# EAGLE board Timer (EAGLE 9.6.2)
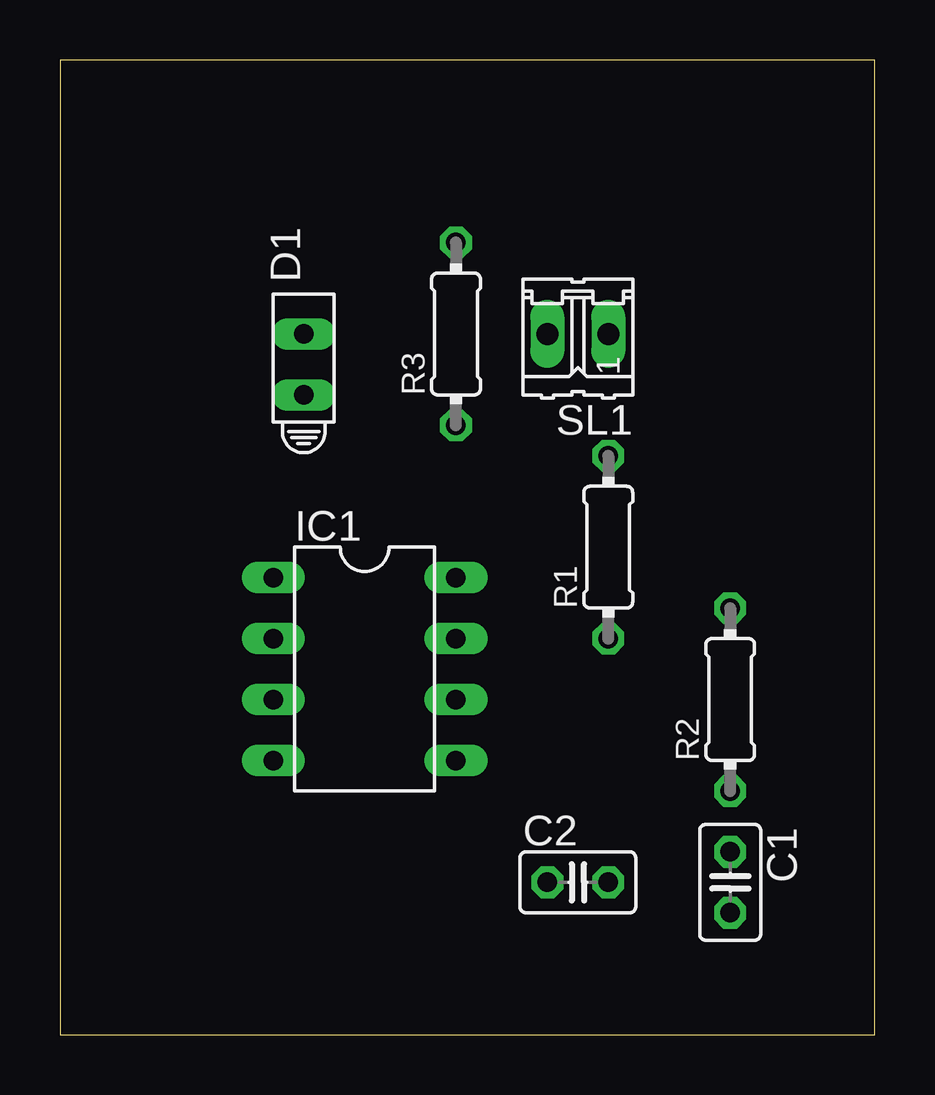
[diagram p0: board, top side]
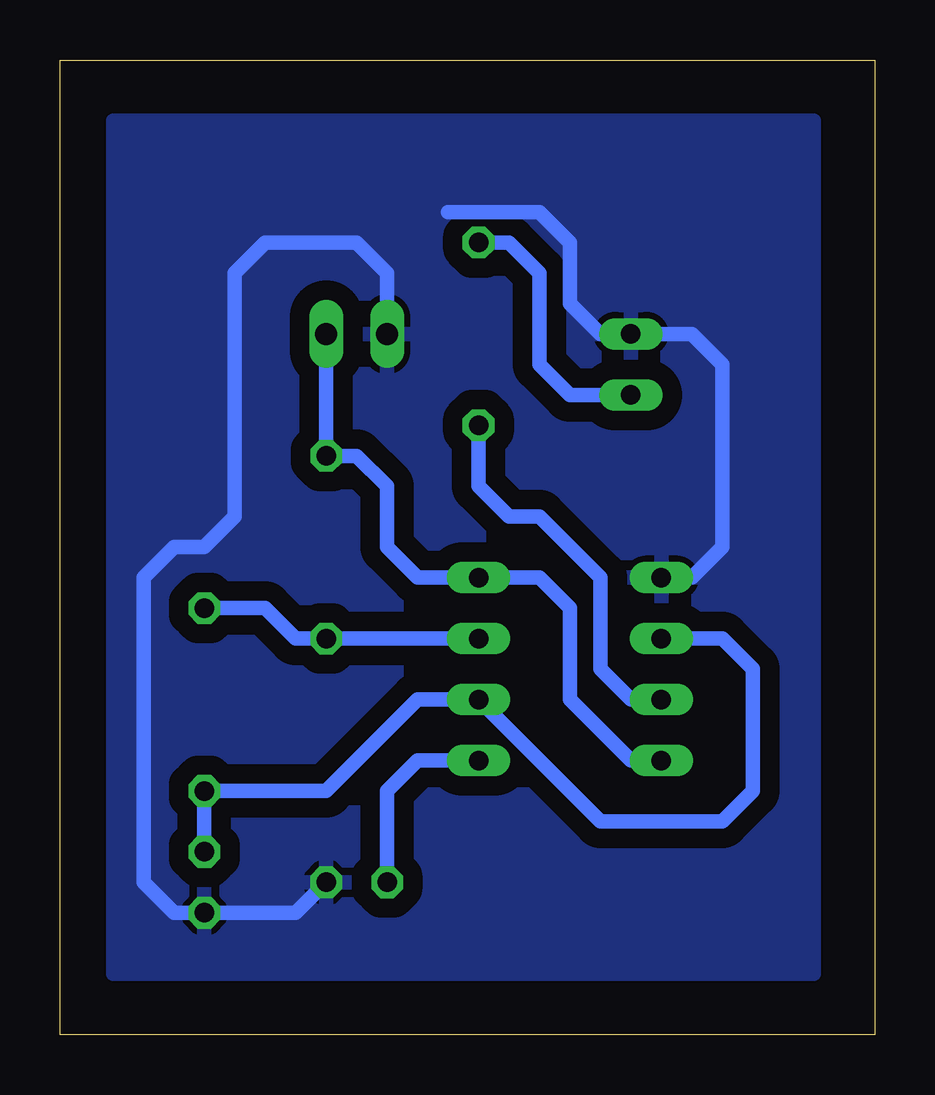
[diagram p1: board, bottom side, seen from below]

Size 33.96 x 40.63 mm. Coordinates in mm from the lower left corner, seen from the top.
Outline: 0,0 33.96,0 33.96,40.63 0,40.63 0,0
Copper layers (1*16): Top 0.035mm / dielectric 1.5mm / Bottom 0.035mm
Design rules "default": minimum track width 6mil, minimum drill 0.35mm, track to track 6mil, track to pad 6mil, pad to pad 6mil, via to via 6mil, smd to smd 6mil, copper to edge 40mil, drill to drill 6mil, minimum pad ring 10mil, minimum via ring 8mil, stop-mask expansion 4mil, vias tented up to drill 0mil, thermal gap 10mil

## Footprints (pad centres in the part's own frame; a part is rotated, then mirrored left to right if it is on the bottom)
C025-025X050 = drill 0.813 octagon: 1 -1.27,0; 2 1.27,0
HLMP6 = drill 0.813 long: A -1.27,0; K 1.27,0
DIL-08 = drill 0.813 long: 1 -3.81,-3.81; 2 -1.27,-3.81; 3 1.27,-3.81; 4 3.81,-3.81; 5 3.81,3.81; 6 1.27,3.81; 7 -1.27,3.81; 8 -3.81,3.81
0204/7 = drill 0.813 octagon: 1 -3.81,0; 2 3.81,0
02P = drill 0.914 long: 1 -1.27,0; 2 1.27,0

## Placement (x,y rotation side)
C1  10uF  [C025-025X050]  27.94,6.35 270 top
C2  0.01uF  [C025-025X050]  21.59,6.35 0 top
D1  HLMP6  [HLMP6]  10.16,27.94 90 top
IC1  NE555  [DIL-08]  12.7,15.24 270 top
R1  3.9K  [0204/7]  22.86,20.32 90 top
R2  68K  [0204/7]  27.94,13.97 90 top
R3  1K  [0204/7]  16.51,29.21 90 top
SL1  9V  [02P]  21.59,29.21 180 top

## Library data of the parts
C1 C2 = rcl; SPICEPREFIX: C
D1 = display-hp; MF: AGILENT TECHNOLOGIES; MPN: HLMP-6500; OC_FARNELL: 1652490; OC_NEWARK: 40K0088
IC1 = st-microelectronics; MF: Arrow Electronics; MPN: NE555N; OC_FARNELL: 1467742; OC_NEWARK: 89K1486
R1-R3 = rcl; SPICEPREFIX: R
SL1 = con-amp-quick; OC_FARNELL: unknown; OC_NEWARK: unknown

## Nets
GND: C1.2 C2.2 D1.K IC1.1 SL1.2
N$1: C1.1 IC1.2 IC1.6 R2.1
N$2: IC1.7 R1.1 R2.2
N$4: C2.1 IC1.5
N$6: IC1.3 R3.1
N$7: D1.A R3.2
VCC+: IC1.4 IC1.8 R1.2 SL1.1

## Tracks (layer width: path | path; a pad name or v marks a point on that pad's centre or on a via)
GND
  Bottom 0.61: C2.2 24.13,5.08 C1.2 29.21,5.08 30.48,6.35 30.48,19.05 29.21,20.32 27.94,20.32 26.67,21.59 26.67,31.75 25.4,33.02 21.59,33.02 20.32,31.75 SL1.2 | IC1.1 7.62,19.05 6.35,20.32 6.35,27.94 7.62,29.21 D1.K 11.43,29.21 12.7,30.48 12.7,31.75 12.7,33.02 13.97,34.29 17.78,34.29
  pour Bottom (isolate 0.813): 3.81,38.1 31.75,38.1 31.75,2.54 2.54,2.54 2.54,38.1
N$1
  Bottom 0.61: C1.1 R2.1 22.86,10.16 19.05,13.97 IC1.6 11.43,8.89 6.35,8.89 5.08,10.16 5.08,15.24 6.35,16.51 IC1.2
N$2
  Bottom 0.61: IC1.7 R1.1 24.13,16.51 25.4,17.78 R2.2
N$4
  Bottom 0.61: IC1.5 19.05,11.43 20.32,10.16 C2.1
N$6
  Bottom 0.61: IC1.3 10.16,13.97 11.43,15.24 11.43,19.05 13.97,21.59 15.24,21.59 16.51,22.86 R3.1
N$7
  Bottom 0.61: R3.2 15.24,33.02 13.97,31.75 13.97,27.94 12.7,26.67 D1.A
VCC+
  Bottom 0.61: SL1.1 R1.2 21.59,24.13 20.32,22.86 20.32,20.32 19.05,19.05 IC1.8 13.97,19.05 12.7,17.78 12.7,13.97 10.16,11.43 IC1.4